# Altium PCB DIP SWITCH.PcbDoc
Units mm, origin at the board's own origin, x right, y up, seen from the top; angles counter-clockwise.
Board outline 80 x 86.5 mm, 2 copper layers (Top Layer, Bottom Layer); 19 components, 66 nets, 250 pads, 0 vias.
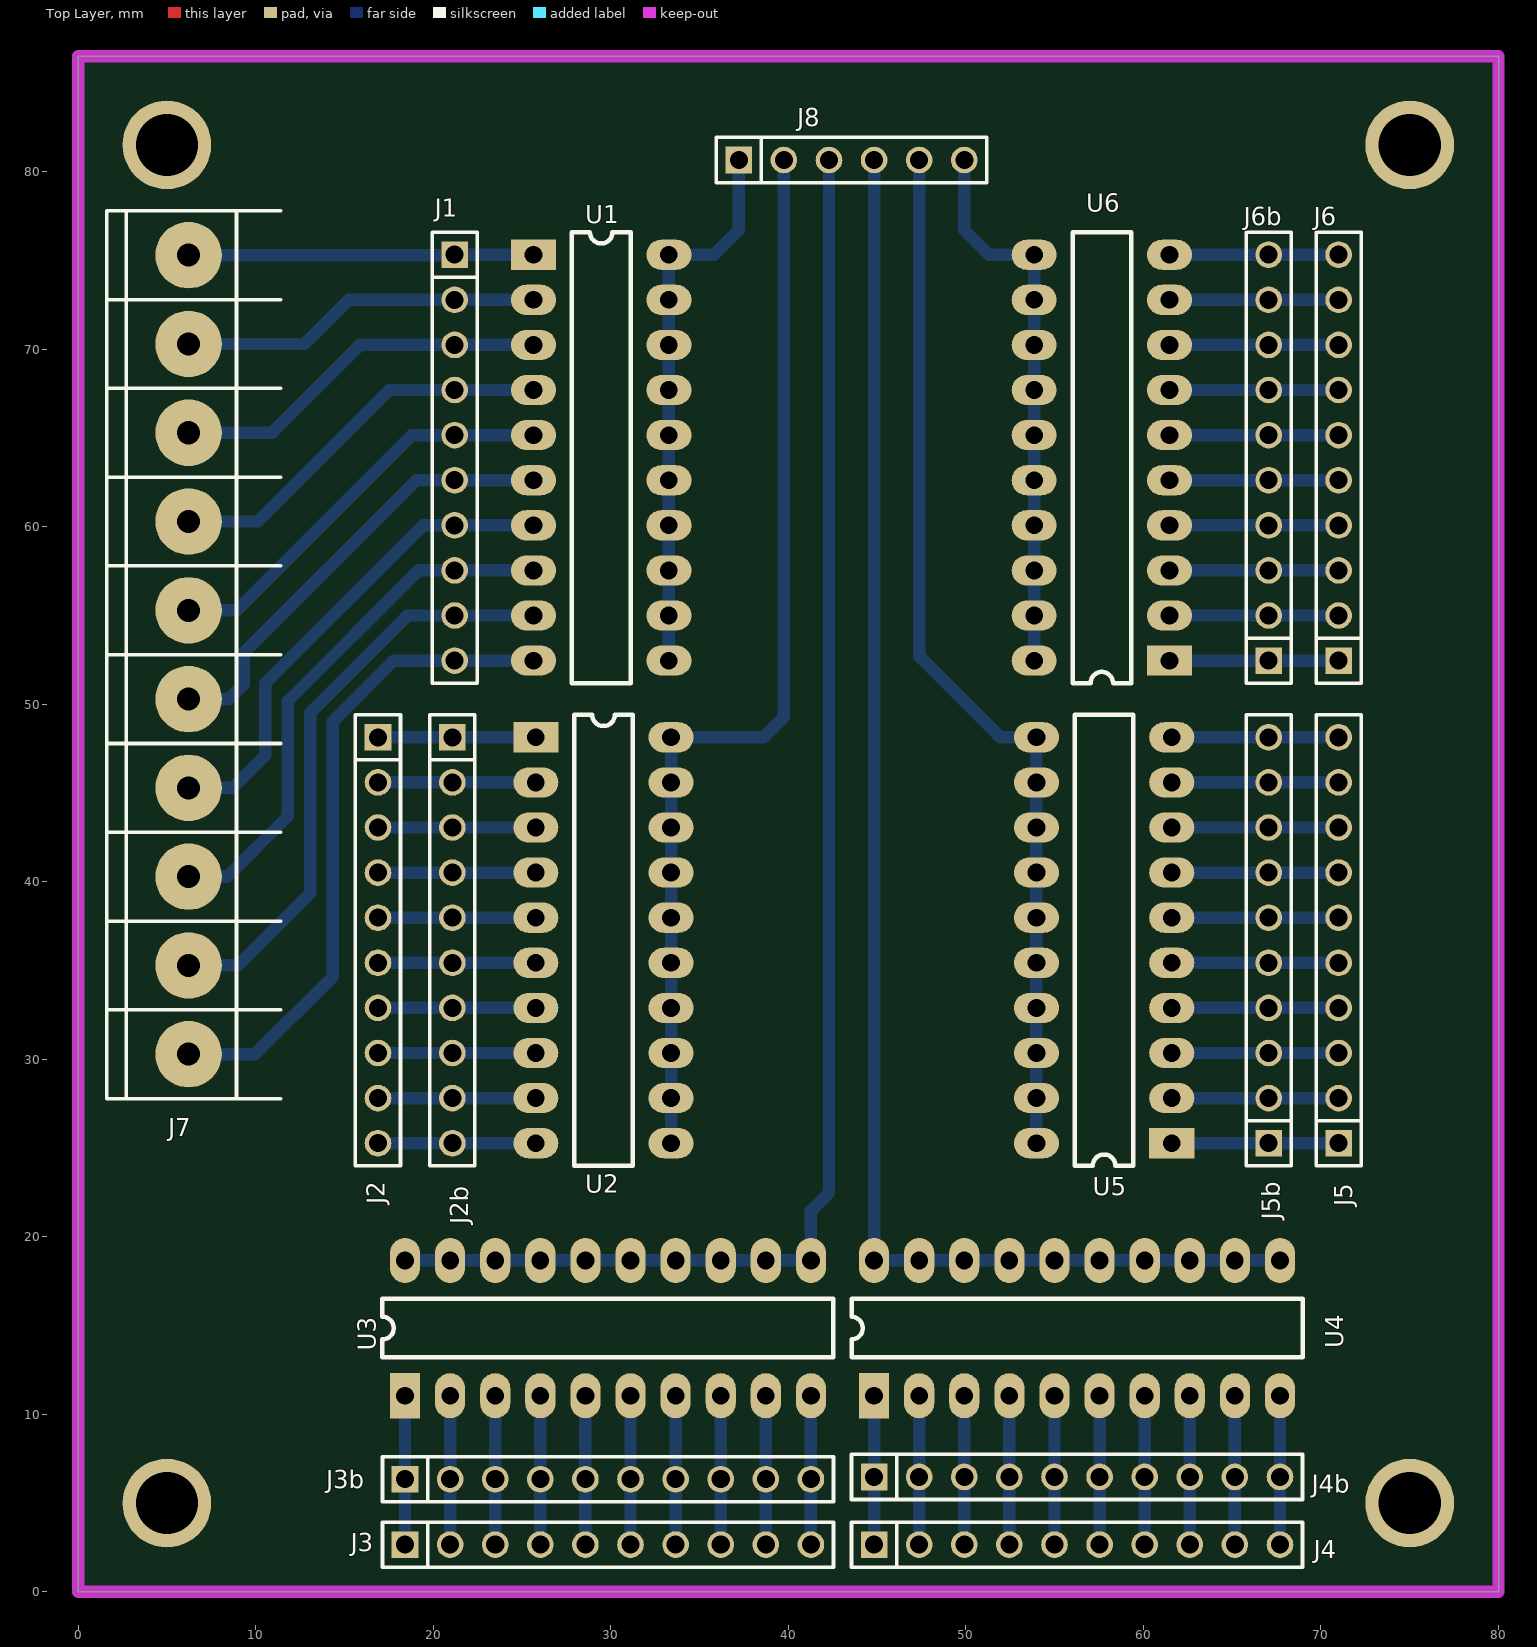
[diagram p0: Top Layer view]
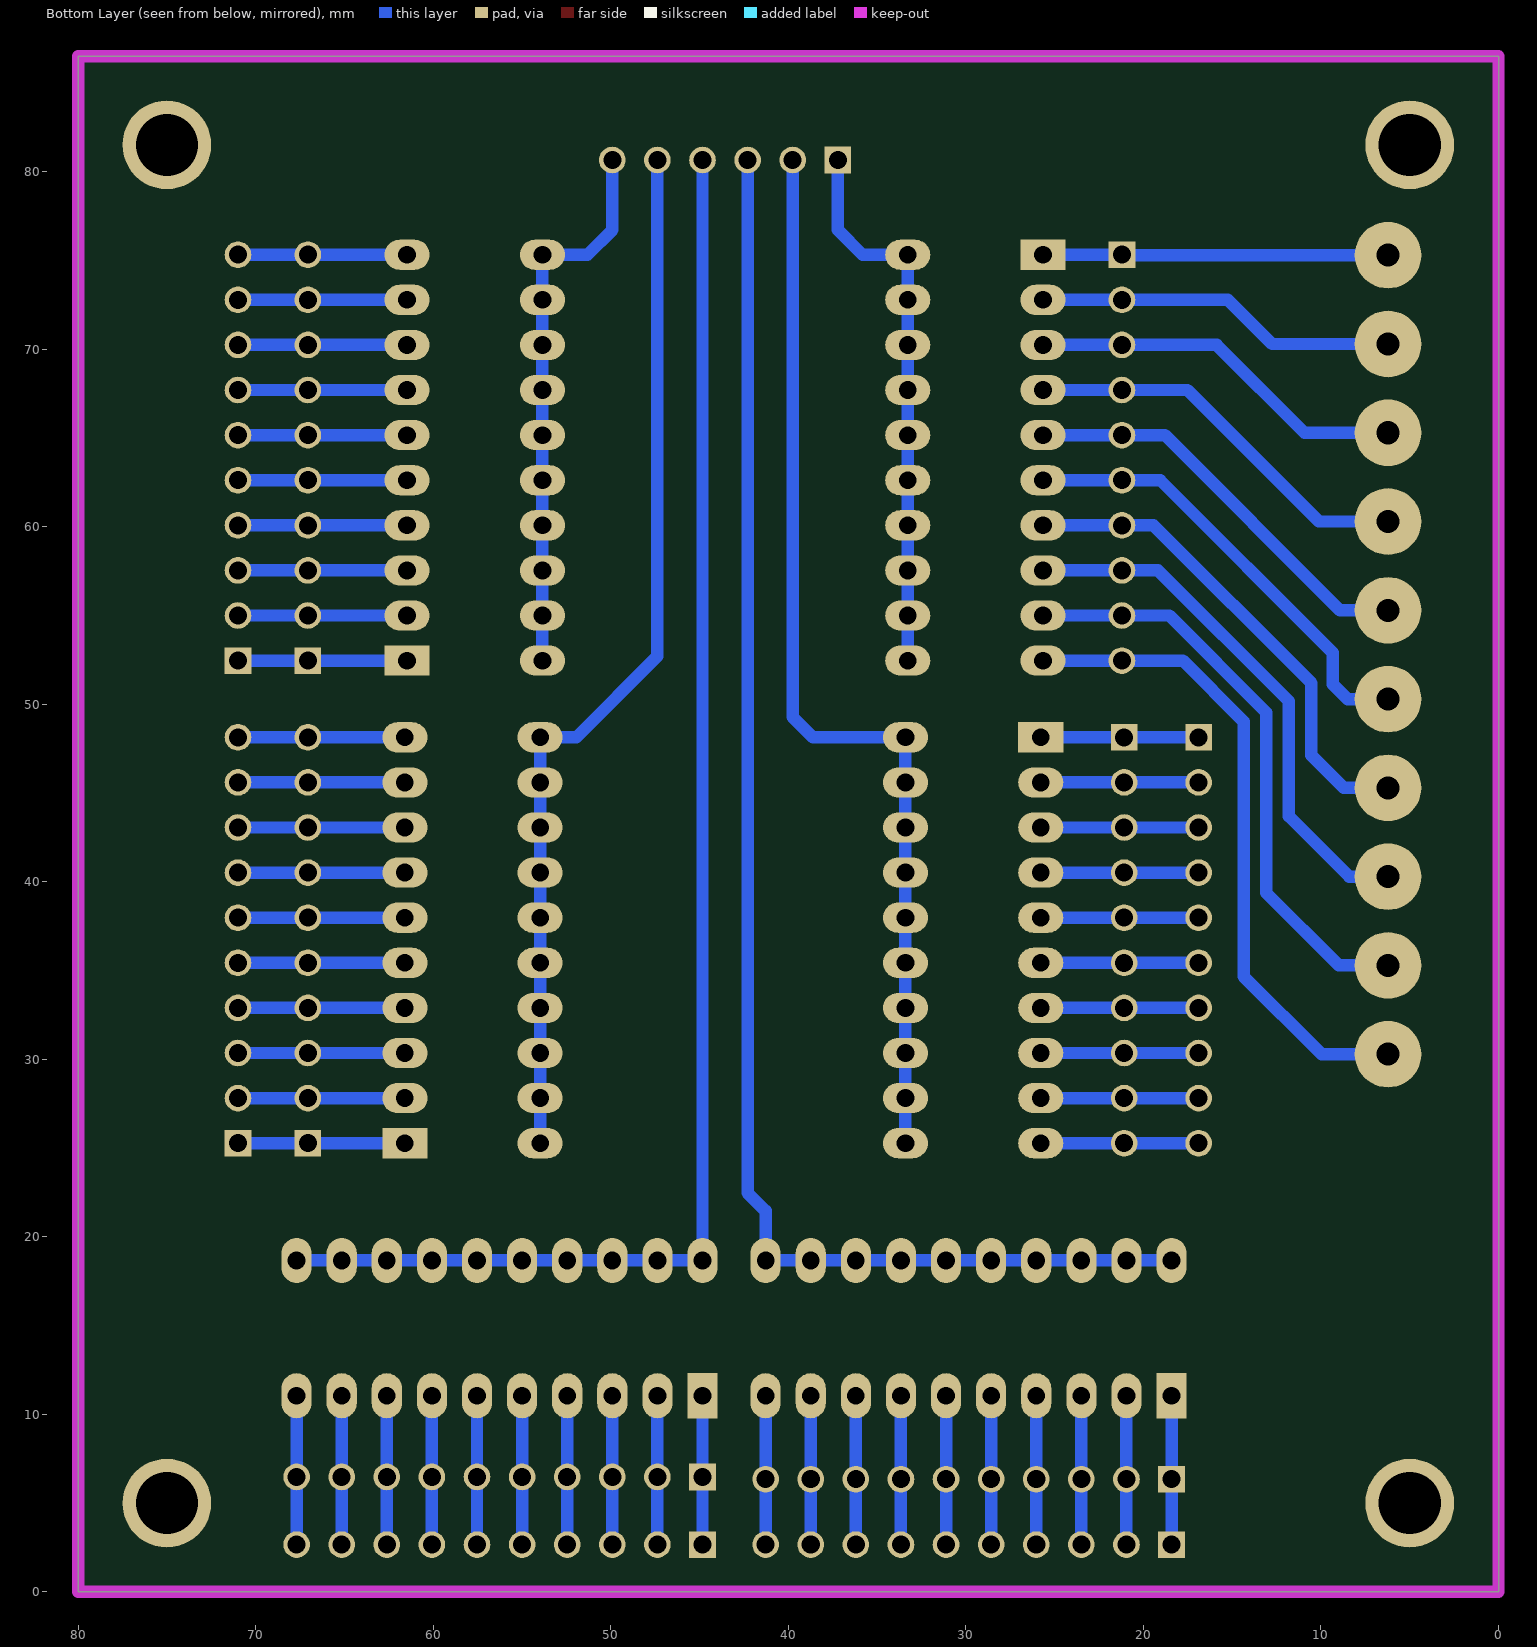
[diagram p1: Bottom Layer view, seen from below]

## Layer stack, top to bottom
Top Solder: solder mask 0.0102, Solder Resist, Dk 3.5
Top Layer: signal copper 0.0356
Dielectric 1: dielectric 0.32, FR-4, Dk 4.8
Bottom Layer: signal copper 0.0356
Bottom Solder: solder mask 0.0102, Solder Resist, Dk 3.5

## Board outline
0,0 0,86.5 80,86.5 80,0

## Design rules (kind name [scope] priority, off if disabled: settings)
Clearance Clearance_1 [InPolygon] p1: gap=0.9
Clearance [All] p2: gap=0.5
PolygonConnect [All] p1: connectstyle=Relief reliefconductorwidth=0.254 reliefentries=4 polygonreliefangle="90 Angle" airgapwidth=0.254
RoutingVias [All] p1: holewidth=0.711 width=1.27 viastyle="Through Hole" minholewidth=0.711 minwidth=1.27 maxholewidth=0.711 maxwidth=1.27
SolderMaskExpansion [All] p1: expansion=0.102
Width [All] p1: maxlimit=0.7 minlimit=0.254 preferedwidth=0.7 toplayer_maxwidth=0.254 toplayer_prefwidth=0.254 bottomlayer_minwidth=0.7 minimp=50.000000 maximp=50.000000 favimp=50.000000
30 further rules are at their usual default settings.

## Classes and differential pairs
component class "DIP SWITCH": J1 J2 J2b J3 J3b J4 J4b J5 J5b J6b J7 J8 U1 U2 U3 U4 U5 U6

## Components (designator, comment, footprint, x,y, rotation, side; value= is the part's Value field where it differs from the comment)
J1 "CON10" SIP10 21.209,75.311 r270 top
J2 "CON10" SIP10 21.082,48.133 r270 top
J2b "CON10" SIP10 16.891,48.133 r270 top
J3 "CON10" SIP10 18.415,2.667 r0 top
J3b "CON10" SIP10 18.415,6.35 r0 top
J4 "CON10" SIP10 44.831,6.477 r0 top
J4b "CON10" SIP10 44.831,2.667 r0 top
J5 "CON10" SIP10 70.993,25.273 r90 top
J5b "CON10" SIP10 67.056,25.273 r90 top
J6 "CON10" SIP10 70.993,52.451 r90 top
J6b "CON10" SIP10 67.056,52.451 r90 top (schematic designator J6)
J7 "ENTRADA" BORNERA10 6.223,57.785 r0 top
J8 "CON6" SIP6 37.211,80.645 r0 top
U1 "DIP_SWITCH_10" DIP20 25.654,75.311 r0 top
U2 "DIP_SWITCH_10" DIP20 25.781,48.133 r0 top
U3 "DIP_SWITCH_10" DIP20 18.415,11.049 r90 top
U4 "DIP_SWITCH_10" DIP20 44.831,11.049 r90 top
U5 "DIP_SWITCH_10" DIP20 61.595,25.273 r180 top
U6 "DIP_SWITCH_10" DIP20 61.468,52.451 r180 top

## Footprints (in the part's own frame and the unit in brackets; to place one, negate y for a bottom-side part, rotate by r counter-clockwise, add the part's x,y. Pads: shape width x height; smd on the part's side, far side on the other; paste and mask are expansions set on the pad)
BORNERA10 [mm] "Bornera con Tornillos 5mm separación"
  round 3.75 hole 1.3: 1(0,17.5) 2(0,12.5) 3(0,7.5) 4(0,2.5) 5(0,-2.5) 6(0,-7.5) 7(0,-12.5) 8(0,-17.5) 9(0,-22.5) 10(0,-27.5)
  silkscreen extent -4.6,-30 5.2,20, body extent -3.76,-29.89 3.94,20.61, height 10
DIP20 [mm]
  rect 2.54x1.7 hole 1: 1(0,0)
  oval 2.54x1.7 hole 1: 2(0,-2.54) 3(0,-5.08) 4(0,-7.62) 5(0,-10.16) 6(0,-12.7) 7(0,-15.24) 8(0,-17.78) 9(0,-20.32) 10(0,-22.86) 11(7.62,-22.86) 12(7.62,-20.32) 13(7.62,-17.78) 14(7.62,-15.24) 15(7.62,-12.7) 16(7.62,-10.16) 17(7.62,-7.62) 18(7.62,-5.08) 19(7.62,-2.54) 20(7.62,0)
  silkscreen extent 2.16,-24.13 5.46,1.27
SIP6 [mm]
  rect 1.5x1.5 hole 1.016: 1(0,0)
  round 1.5 hole 1.016: 2(2.54,0) 3(5.08,0) 4(7.62,0) 5(10.16,0) 6(12.7,0)
  silkscreen extent -1.27,-1.27 13.97,1.27, body extent -1.27,-1.3 13.97,1.24, height 8.38
SIP10 [mm]
  rect 1.5x1.5 hole 1.016: 1(0,0)
  round 1.5 hole 1.016: 2(2.54,0) 3(5.08,0) 4(7.62,0) 5(10.16,0) 6(12.7,0) 7(15.24,0) 8(17.78,0) 9(20.32,0) 10(22.86,0)
  silkscreen extent -1.27,-1.27 24.13,1.27, body extent -1.27,-1.3 24.13,1.27, height 8.38

## Part data
J7: library part BORNERA10
U1 U2 U3 U4 U5 U6: library part DIPSWITCH10, "Dip_Switch 10 Posiciones"

## Free pads (board coordinates)
  round 5 hole 3.5: 0(5,5) 0(5,81.5) 0(75,5) 0(75,81.5)

## Nets (pads, with @x,y where several pads share a name; then routed paths per layer and width w, separated by ;. In a path a pad name is that pad's centre, name@x,y a point inside that pad or via, vN(x,y) a via of type N, cw(c..) or ccw(c..) an arc to the next point about the centre after c; other vN are vias at no path point)
S0: J1.10 J7.10 U1.10 | length 37
  Bottom Layer w0.7: J7.10 9.965,30.285 14.351,34.671 14.351,49.022 17.78,52.451 J1.10 U1.10
S1: J1.1 J7.1 U1.1 | length 19.4
  Bottom Layer w0.7: J7.1 J1.1@21.183,75.285 ; J1.1 U1.1
S2: J1.2 J7.2 U1.2 | length 20.5
  Bottom Layer w0.7: J7.2 12.754,70.285 15.24,72.771 J1.2 U1.2
S3: J1.3 J7.3 U1.3 | length 21.5
  Bottom Layer w0.7: J7.3 10.929,65.285 15.875,70.231 J1.3 U1.3
S4: J1.4 J7.4 U1.4 | length 22.5
  Bottom Layer w0.7: J7.4 10.12,60.285 17.526,67.691 J1.4 U1.4
S5: J1.5 J7.5 U1.5 | length 23.5
  Bottom Layer w0.7: J7.5 8.93,55.285 18.796,65.151 J1.5 U1.5
S6: J1.6 J7.6 U1.6 | length 25.6
  Bottom Layer w0.7: J7.6 8.502,50.285 9.341,51.124 9.341,52.902 19.05,62.611 J1.6 U1.6
S7: J1.7 J7.7 U1.7 | length 27.9
  Bottom Layer w0.7: J7.7 8.709,45.285 10.541,47.117 10.541,51.181 19.431,60.071 J1.7 U1.7
S8: J1.8 J7.8 U1.8 | length 30.4
  Bottom Layer w0.7: J7.8 8.408,40.285 11.811,43.688 11.811,50.165 19.177,57.531 J1.8 U1.8
S9: J1.9 J7.9 U1.9 | length 33.5
  Bottom Layer w0.7: J7.9 8.996,35.285 13.081,39.37 13.081,49.53 18.542,54.991 J1.9 U1.9
T1: J8.1 U1.11 U1.12 U1.13 U1.14 U1.15 U1.16 U1.17 U1.18 U1.19 U1.20 | length 31.3
  Bottom Layer w0.7: U1.11 U1.12 U1.13 U1.14 U1.15 U1.16 U1.17 U1.18 U1.19 U1.20 35.814,75.311 37.211,76.708 J8.1
T2: J8.2 U2.11 U2.12 U2.13 U2.14 U2.15 U2.16 U2.17 U2.18 U2.19 U2.20 | length 61.1
  Bottom Layer w0.7: U2.11 U2.12 U2.13 U2.14 U2.15 U2.16 U2.17 U2.18 U2.19 U2.20 38.608,48.133 39.751,49.276 J8.2
T2_S0: J2.10 J2b.10 U2.10 | length 8.9
  Bottom Layer w0.7: J2b.10 J2.10 U2.10
T2_S1: J2.1 J2b.1 U2.1 | length 8.9
  Bottom Layer w0.7: J2b.1 J2.1 U2.1
T2_S2: J2.2 J2b.2 U2.2 | length 8.9
  Bottom Layer w0.7: J2b.2 J2.2 U2.2
T2_S3: J2.3 J2b.3 U2.3 | length 8.9
  Bottom Layer w0.7: J2b.3 J2.3 U2.3
T2_S4: J2.4 J2b.4 U2.4 | length 8.9
  Bottom Layer w0.7: J2b.4 J2.4 U2.4
T2_S5: J2.5 J2b.5 U2.5 | length 8.9
  Bottom Layer w0.7: J2b.5 J2.5 U2.5
T2_S6: J2.6 J2b.6 U2.6 | length 8.9
  Bottom Layer w0.7: J2b.6 J2.6 U2.6
T2_S7: J2.7 J2b.7 U2.7 | length 8.9
  Bottom Layer w0.7: J2b.7 J2.7 U2.7
T2_S8: J2.8 J2b.8 U2.8 | length 8.9
  Bottom Layer w0.7: J2b.8 J2.8 U2.8
T2_S9: J2.9 J2b.9 U2.9 | length 8.9
  Bottom Layer w0.7: J2b.9 J2.9 U2.9
T3: J8.3 U3.11 U3.12 U3.13 U3.14 U3.15 U3.16 U3.17 U3.18 U3.19 U3.20 | length 85.3
  Bottom Layer w0.7: U3.20 U3.19 U3.18 U3.17 U3.16 U3.15 U3.14 U3.13 U3.12 U3.11 41.275,21.463 42.291,22.479 J8.3
T3_S0: J3.10 J3b.10 U3.10 | length 8.4
  Bottom Layer w0.7: J3.10 J3b.10 U3.10
T3_S1: J3.1 J3b.1 U3.1 | length 8.4
  Bottom Layer w0.7: J3.1 J3b.1 U3.1
T3_S2: J3.2 J3b.2 U3.2 | length 8.4
  Bottom Layer w0.7: J3.2 J3b.2 U3.2
T3_S3: J3.3 J3b.3 U3.3 | length 8.4
  Bottom Layer w0.7: J3.3 J3b.3 U3.3
T3_S4: J3.4 J3b.4 U3.4 | length 8.4
  Bottom Layer w0.7: J3.4 J3b.4 U3.4
T3_S5: J3.5 J3b.5 U3.5 | length 8.4
  Bottom Layer w0.7: J3.5 J3b.5 U3.5
T3_S6: J3.6 J3b.6 U3.6 | length 8.4
  Bottom Layer w0.7: J3.6 J3b.6 U3.6
T3_S7: J3.7 J3b.7 U3.7 | length 8.4
  Bottom Layer w0.7: J3.7 J3b.7 U3.7
T3_S8: J3.8 J3b.8 U3.8 | length 8.4
  Bottom Layer w0.7: J3.8 J3b.8 U3.8
T3_S9: J3.9 J3b.9 U3.9 | length 8.4
  Bottom Layer w0.7: J3.9 J3b.9 U3.9
T4: J8.4 U4.11 U4.12 U4.13 U4.14 U4.15 U4.16 U4.17 U4.18 U4.19 U4.20 | length 84.8
  Bottom Layer w0.7: J8.4 U4.20 U4.19 U4.18 U4.17 U4.16 U4.15 U4.14 U4.13 U4.12 U4.11
T4_S0: J4.10 J4b.10 U4.10 | length 8.4
  Bottom Layer w0.7: J4b.10 J4.10 U4.10
T4_S1: J4.1 J4b.1 U4.1 | length 8.4
  Bottom Layer w0.7: J4b.1 J4.1 U4.1
T4_S2: J4.2 J4b.2 U4.2 | length 8.4
  Bottom Layer w0.7: J4b.2 J4.2 U4.2
T4_S3: J4.3 J4b.3 U4.3 | length 8.4
  Bottom Layer w0.7: J4b.3 J4.3 U4.3
T4_S4: J4.4 J4b.4 U4.4 | length 8.4
  Bottom Layer w0.7: J4b.4 J4.4 U4.4
T4_S5: J4.5 J4b.5 U4.5 | length 8.4
  Bottom Layer w0.7: J4b.5 J4.5 U4.5
T4_S6: J4.6 J4b.6 U4.6 | length 8.4
  Bottom Layer w0.7: J4b.6 J4.6 U4.6
T4_S7: J4.7 J4b.7 U4.7 | length 8.4
  Bottom Layer w0.7: J4b.7 J4.7 U4.7
T4_S8: J4.8 J4b.8 U4.8 | length 8.4
  Bottom Layer w0.7: J4b.8 J4.8 U4.8
T4_S9: J4.9 J4b.9 U4.9 | length 8.4
  Bottom Layer w0.7: J4b.9 J4.9 U4.9
T5: J8.5 U5.11 U5.12 U5.13 U5.14 U5.15 U5.16 U5.17 U5.18 U5.19 U5.20 | length 59.3
  Bottom Layer w0.7: J8.5 47.371,52.705 51.943,48.133 U5.11 U5.12 U5.13 U5.14 U5.15 U5.16 U5.17 U5.18 U5.19 U5.20
T5_S0: J5.10 J5b.10 U5.10 | length 9.4
  Bottom Layer w0.7: U5.10 J5b.10 J5.10
T5_S1: J5.1 J5b.1 U5.1 | length 9.4
  Bottom Layer w0.7: U5.1 J5b.1 J5.1
T5_S2: J5.2 J5b.2 U5.2 | length 9.4
  Bottom Layer w0.7: U5.2 J5b.2 J5.2
T5_S3: J5.3 J5b.3 U5.3 | length 9.4
  Bottom Layer w0.7: U5.3 J5b.3 J5.3
T5_S4: J5.4 J5b.4 U5.4 | length 9.4
  Bottom Layer w0.7: U5.4 J5b.4 J5.4
T5_S5: J5.5 J5b.5 U5.5 | length 9.4
  Bottom Layer w0.7: U5.5 J5b.5 J5.5
T5_S6: J5.6 J5b.6 U5.6 | length 9.4
  Bottom Layer w0.7: U5.6 J5b.6 J5.6
T5_S7: J5.7 J5b.7 U5.7 | length 9.4
  Bottom Layer w0.7: U5.7 J5b.7 J5.7
T5_S8: J5.8 J5b.8 U5.8 | length 9.4
  Bottom Layer w0.7: U5.8 J5b.8 J5.8
T5_S9: J5.9 J5b.9 U5.9 | length 9.4
  Bottom Layer w0.7: U5.9 J5b.9 J5.9
T6: J8.6 U6.11 U6.12 U6.13 U6.14 U6.15 U6.16 U6.17 U6.18 U6.19 U6.20 | length 31.3
  Bottom Layer w0.7: J8.6 49.911,76.708 51.308,75.311 U6.11 U6.12 U6.13 U6.14 U6.15 U6.16 U6.17 U6.18 U6.19 U6.20
T6_S0: J6.10 J6b.10 U6.10 | length 9.5
  Bottom Layer w0.7: U6.10 J6b.10 J6.10
T6_S1: J6.1 J6b.1 U6.1 | length 9.5
  Bottom Layer w0.7: U6.1 J6b.1 J6.1
T6_S2: J6.2 J6b.2 U6.2 | length 9.5
  Bottom Layer w0.7: U6.2 J6b.2 J6.2
T6_S3: J6.3 J6b.3 U6.3 | length 9.5
  Bottom Layer w0.7: U6.3 J6b.3 J6.3
T6_S4: J6.4 J6b.4 U6.4 | length 9.5
  Bottom Layer w0.7: U6.4 J6b.4 J6.4
T6_S5: J6.5 J6b.5 U6.5 | length 9.5
  Bottom Layer w0.7: U6.5 J6b.5 J6.5
T6_S6: J6.6 J6b.6 U6.6 | length 9.5
  Bottom Layer w0.7: U6.6 J6b.6 J6.6
T6_S7: J6.7 J6b.7 U6.7 | length 9.5
  Bottom Layer w0.7: U6.7 J6b.7 J6.7
T6_S8: J6.8 J6b.8 U6.8 | length 9.5
  Bottom Layer w0.7: U6.8 J6b.8 J6.8
T6_S9: J6.9 J6b.9 U6.9 | length 9.5
  Bottom Layer w0.7: U6.9 J6b.9 J6.9

## Keep-outs
Keep-Out Layer:
  the board outline again, w0.7